# Altium PCB TP3PCB.PcbDoc
Units mm, origin at the board's own origin, x right, y up, seen from the top; angles counter-clockwise.
Board outline 41 x 58.5 mm, 2 copper layers (Top Layer, Bottom Layer); 36 components, 22 nets, 142 pads, 11 vias.
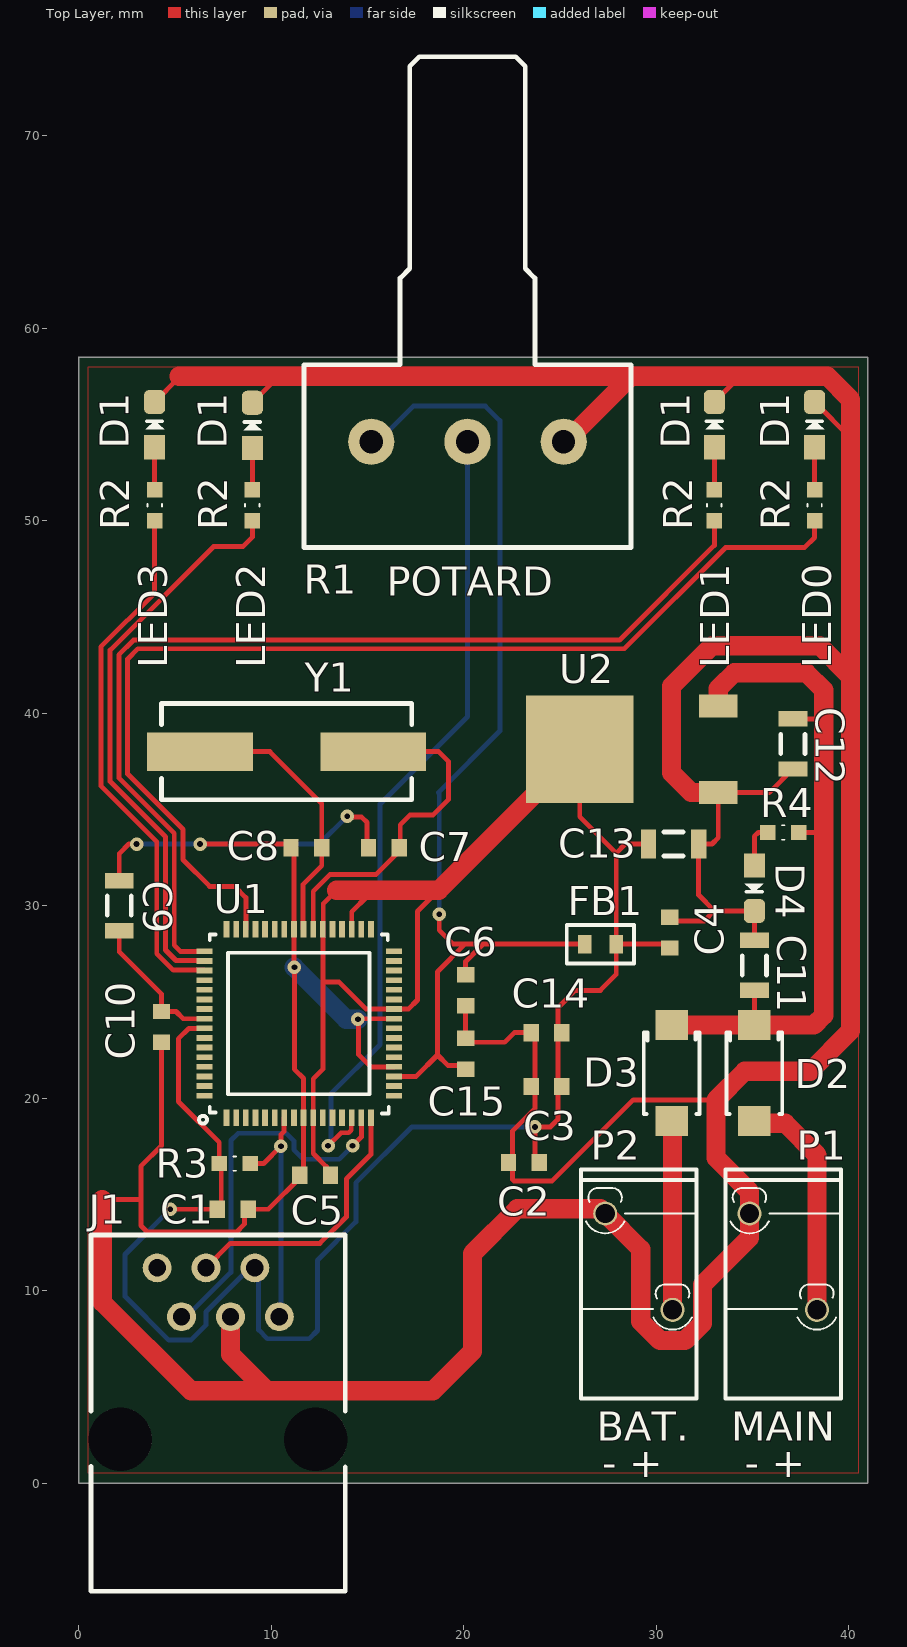
[diagram p0: Top Layer view]
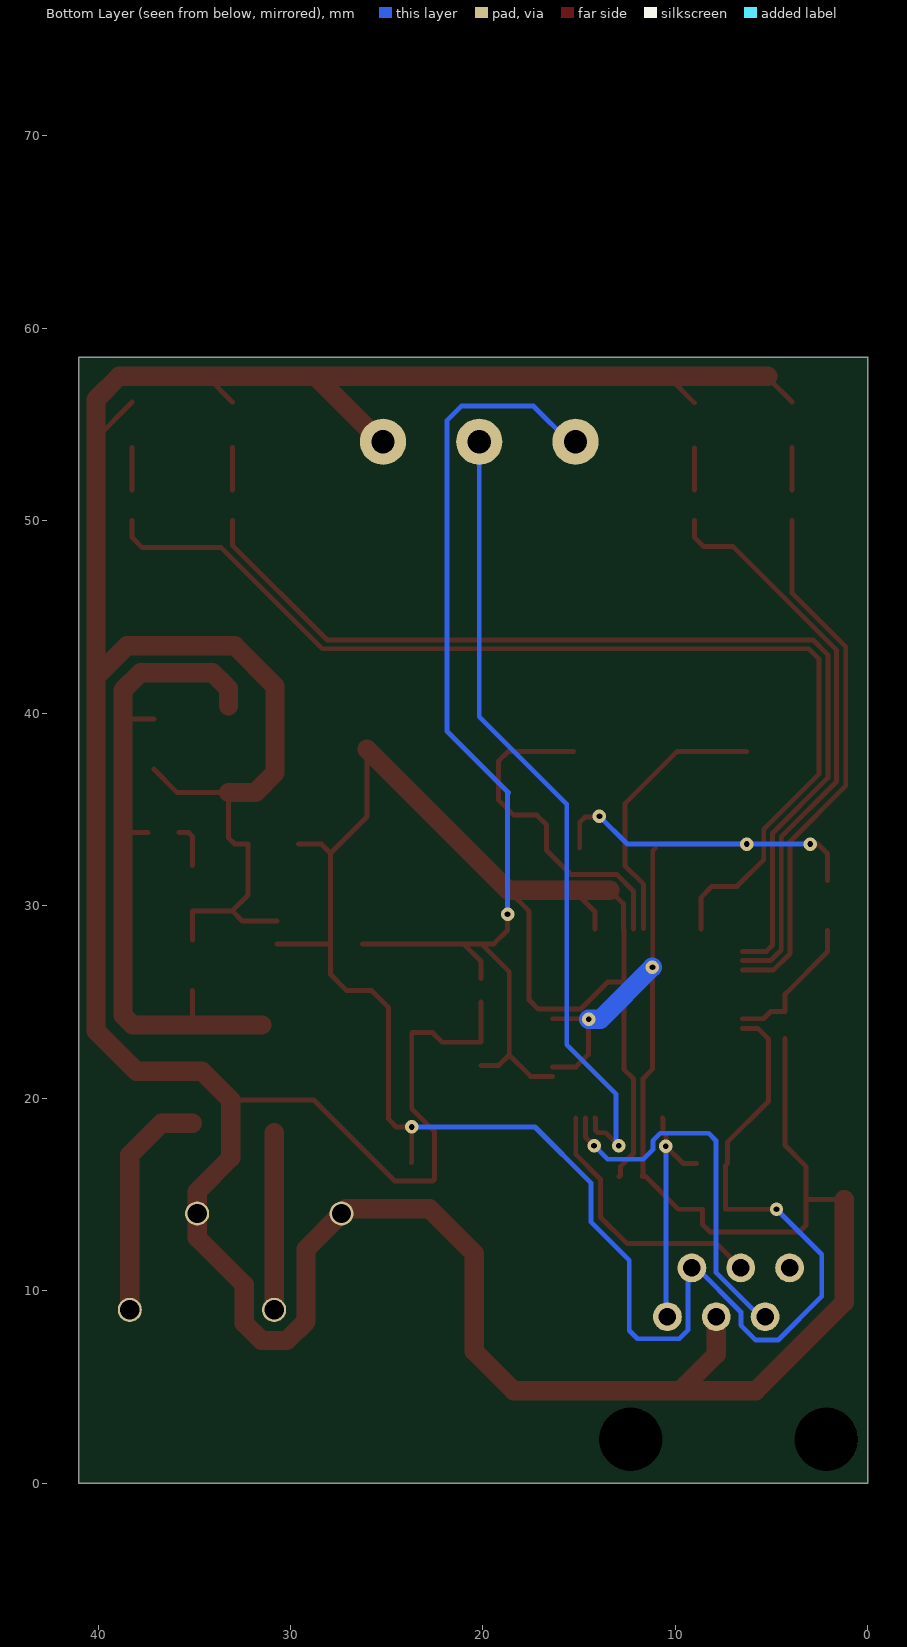
[diagram p1: Bottom Layer view, seen from below]

## Layer stack, top to bottom
Top Solder: solder mask 0.0102, Solder Resist, Dk 3.5
Top Layer: signal copper 0.0356
Dielectric 1: dielectric 0.32, FR-4, Dk 4.8
Bottom Layer: signal copper 0.0356
Bottom Solder: solder mask 0.0102, Solder Resist, Dk 3.5

## Board outline
0,0 0,58.5 41,58.5 41,0

## Design rules (kind name [scope] priority, off if disabled: settings)
Clearance [All] p1: gap=0.2 except(0.254: Arc-Arc)
HoleSize [All] p1: absolutevalues=TRUE maxlimit=3.3 minlimit=0.025 maxpercent=80.000 minpercent=20.000
PolygonConnect [All] p1: connectstyle=Relief reliefconductorwidth=0.254 reliefentries=4 polygonreliefangle="90 Angle" airgapwidth=0.254
RoutingVias [All] p1 off: holewidth=0.711 width=1.27 viastyle="Through Hole" minholewidth=0.711 minwidth=1.27 maxholewidth=0.711 maxwidth=1.27
SilkToBoardRegionClearance [All] p1 off:
SolderMaskExpansion [All] p1: expansion=0.102
UnpouredPolygon [All] p1: allowunpoured=FALSE
Width [All] p1: maxlimit=1 minlimit=0.254 preferedwidth=0.254 minimp=50.000000 maximp=50.000000 favimp=50.000000
Width GND [InNet('GND')] p2: maxlimit=1 minlimit=0.508 preferedwidth=1 minimp=50.000000 maximp=50.000000 favimp=50.000000
Width ALIM [InNet('ALIM')] p3: maxlimit=1 minlimit=0.254 preferedwidth=1
Width BATTERY [InNet('BATTERY')] p4: maxlimit=1 minlimit=0.254 preferedwidth=1
27 further rules are at their usual default settings.

## Classes and differential pairs
channel class led: LED0 LED1 LED2 LED3
net class LED[0..3]: LED0 LED1 LED2 LED3
component class TP3: R1
component class POWER: C11 C12 C13 C14 C15 D2 D3 D4 FB1 P1 P2 R4 U2
component class PIC: C1 C2 C3 C4 C5 C6 C7 C8 C9 C10 J1 R3 U1 Y1
component class LED3: R2
component class LED0: LED3_LED0 R2_3_LED1

## Components (designator, comment, footprint, x,y, rotation, side; value= is the part's Value field where it differs from the comment)
C1 "100nF" CAPC1608N#1 8.001,14.224 r180 top
C2 "100nF" CAPC1608N#1 23.125,16.65 r0 top
C3 "100nF" CAPC1608N#1 24.3,20.6 r0 top
C4 "100nF" CAPC1608N#1 30.7,28.6 r270 top
C5 "100nF" CAPC1608N#1 12.275,16 r0 top
C6 "100nF" CAPC1608N#1 20.1,25.6 r90 top
C7 "20pF" CAPC1608N#1 15.85,33 r180 top
C8 "20pF" CAPC1608N#2 11.825,33 r0 top
C9 "10uF" CAPC2012N 2.1,30 r270 top
C10 "1uF" CAPC1608N#1 4.3,23.7 r90 top
C11 "10uF" CAPC2012N 35.1,26.9 r270 top
C12 "10uF" CAPC2012N 37.1,38.4 r90 top
C13 "10uF" CAPC2012N 30.9,33.2 r180 top
C14 "1uF" CAPC1608N#1 24.3,23.4 r0 top
C15 "100nF" CAPC1608N#1 20.1,22.3 r270 top
D1 "Green LED" "LED 0805" 3.937,54.991 r90 top
D1 "Green LED" "LED 0805" 9.017,54.953 r90 top
D1 "Green LED" "LED 0805" 33.02,54.991 r90 top
D1 "Green LED" "LED 0805" 38.227,54.991 r90 top
D2 "GF1A" SMA/DO-214AC 35.1,21.3 r90 top
D3 "GF1A" SMA/DO-214AC 30.8,21.3 r90 top
D4 "Green LED" "LED 0805" 35.1,30.9 r270 top
FB1 "600r" INDC1608AN 27.1,28 r0 top
J1 "Program / Debug" RJ12_90 7.239,6.731 r270 top
P1 "12V Main" PHOENIX_1985195 36.6,11.5 r0 top
P2 "12V Battery" PHOENIX_1985195 29.1,11.5 r0 top
R1 "1kΩ" PDB181-K 20.193,54.102 r0 top
R2 "330Ω" RESC1608N 3.937,50.8 r270 top
R2 "330Ω" RESC1608N 9.017,50.8 r270 top
R2 "330Ω" RESC1608N 33.02,50.8 r270 top
R2 "330Ω" RESC1608N 38.227,50.8 r270 top
R3 "4.7kΩ" RESC1608N 8.1,16.6 r180 top
R4 "470Ω" RESC1608N 36.6,33.8 r0 top
U1 "PIC32MX764F128H-I/PT" QFP50P1200X1200X120-64 11.43,23.876 r90 top
U2 "AP1117" TD03B_N 29.625,38.125 r90 top
Y1 "8MHz" HC49SDLF 10.8,38 r0 top

## Footprints (in the part's own frame and the unit in brackets; to place one, negate y for a bottom-side part, rotate by r counter-clockwise, add the part's x,y. Pads: shape width x height; smd on the part's side, far side on the other; paste and mask are expansions set on the pad)
CAPC1608N#1 [mm]
  rect 0.8x0.9 smd: 1(-0.8,0) 2(0.8,0)
CAPC1608N#2 [mm]
  rect 0.8x0.9 smd: 1(0.8,0) 2(-0.8,0)
CAPC2012N [mm]
  rect 0.8x1.5 smd: 1(-1.3,0) 2(1.3,0)
  silkscreen extent -0.5,-0.63 0.5,0.63
HC49SDLF [mm]
  rect 5.5x2 smd: 1(-4.5,0) 2(4.5,0)
  silkscreen extent -6.5,-2.5 6.5,2.5
INDC1608AN [mm]
  rect 0.7x0.95 smd: 1(0.825,0) 2(-0.825,0)
  silkscreen extent -1.75,-1 1.75,1
"LED 0805" [mm]
  rect 1.25x1.1 smd: 1(-1.175,0)
  rrect50% 1.25x1.1 smd: 2(1.175,0)
  silkscreen extent -0.25,-0.5 0.2,0.45
PDB181-K [mm]
  round 2.4 hole 1.2: 1(-5,0) 2(0,0) 3(5,0)
  silkscreen extent -8.5,-5.5 8.5,20
PHOENIX_1985195 [mm]
  round 1.25 hole 1: 1(-1.75,2.5) 2(1.75,-2.5)
  silkscreen extent -3,-7.1 3,4.8
QFP50P1200X1200X120-64 [mm]
  rect 0.85x0.3 smd: 1(-4.9,3.75) 2(-4.9,3.25) 3(-4.9,2.75) 4(-4.9,2.25) 5(-4.9,1.75) 6(-4.9,1.25) 7(-4.9,0.75) 8(-4.9,0.25) 9(-4.9,-0.25) 10(-4.9,-0.75) 11(-4.9,-1.25) 12(-4.9,-1.75) 13(-4.9,-2.25) 14(-4.9,-2.75) 15(-4.9,-3.25) 16(-4.9,-3.75) 33(4.9,-3.75) 34(4.9,-3.25) 35(4.9,-2.75) 36(4.9,-2.25) 37(4.9,-1.75) 38(4.9,-1.25) 39(4.9,-0.75) 40(4.9,-0.25) 41(4.9,0.25) 42(4.9,0.75) 43(4.9,1.25) 44(4.9,1.75) 45(4.9,2.25) 46(4.9,2.75) 47(4.9,3.25) 48(4.9,3.75)
  rect 0.3x0.85 smd: 17(-3.75,-4.95) 18(-3.25,-4.95) 19(-2.75,-4.95) 20(-2.25,-4.95) 21(-1.75,-4.95) 22(-1.25,-4.95) 23(-0.75,-4.95) 24(-0.25,-4.95) 25(0.25,-4.95) 26(0.75,-4.95) 27(1.25,-4.95) 28(1.75,-4.95) 29(2.25,-4.95) 30(2.75,-4.95) 31(3.25,-4.95) 32(3.75,-4.95) 49(3.75,4.9) 50(3.25,4.9) 51(2.75,4.9) 52(2.25,4.9) 53(1.75,4.9) 54(1.25,4.9) 55(0.75,4.9) 56(0.25,4.9) 57(-0.25,4.9) 58(-0.75,4.9) 59(-1.25,4.9) 60(-1.75,4.9) 61(-2.25,4.9) 62(-2.75,4.9) 63(-3.25,4.9) 64(-3.75,4.9)
  silkscreen extent -5.21,-4.67 4.62,5.18
RESC1608N [mm]
  rect 0.8x0.8 smd: 1(-0.8,0) 2(0.8,0)
  silkscreen extent -0.08,-0.38 0.08,0.38
RJ12_90 [mm]
  round 3.25 hole 3.3 unplated: 0(4.45,5.08) 0(4.45,-5.08)
  round 1.5 hole 0.9: 1(-1.91,3.18) 2(-4.45,1.91) 3(-1.91,0.64) 4(-4.45,-0.63) 5(-1.91,-1.9) 6(-4.45,-3.17)
  silkscreen extent -6.15,-6.6 12.35,6.6
SMA/DO-214AC [mm]
  rect 1.56x1.68 smd: 1(-2.5,0) 2(2.5,0)
  silkscreen extent -2.12,-1.45 2.1,1.45
TD03B_N [mm]
  rect 1.2x2 smd: 1(-2.25,-3.6) 3(2.25,-3.6)
  rect 5.6x5.6 smd: 4(0,3.6)

## Part data
C1 C2 C3 C4 C5 C6 C7 C8 C9 C10 C11 C12 C13 C14 C15: library part Cap, "Capacitor"
D1 D1 D1 D1 D4: library part LED0, "Typical INFRARED GaAs LED"
D2 D3: library part Diode, "Default Diode"
FB1: library part Inductor, "Inductor"
J1: library part CON6
P1 P2: library part "Header 2", "Header, 2-Pin"
R1: library part RPot, "Potentiometer"
R2 R2 R2 R2 R3 R4: library part Res1, "Resistor"
U1: "PIC32MX764F128H"
U2: "1A LDO, 18V input, DPAK"
Y1: library part XTAL, "Crystal Oscillator"

## Via types
v1: diameter 0.7, hole 0.3, Top Layer to Bottom Layer, 11 vias

## Nets (pads, with @x,y where several pads share a name; then routed paths per layer and width w, separated by ;. In a path a pad name is that pad's centre, name@x,y a point inside that pad or via, vN(x,y) a via of type N, cw(c..) or ccw(c..) an arc to the next point about the centre after c; other vN are vias at no path point)
ALIM: D2.1 P1.2 | length 12
  Top Layer w1: D2.1@35.1,18.7 36.7,18.7 38.35,17.05 P1.2
BATTERY: D3.1 P2.2 | length 9.2
  Top Layer w1: P2.2 D3.1@30.85,18.2
GND: C1.1 C2.1 C3.1 C4.1 C5.1 C6.1 C7.2 C8.2 C9.1 C10.1 C11.1 C12.1 C13.1 C14.1 C15.1 D1.2 D4.2 J1.3 P1.1 P2.1 R1.3 U1.9 U1.20 U1.25 U1.41 U2.1 | length 291.5
  Top Layer w0.254: 1.225,14.725 3.225,14.725 ; C9.1 2.1,32.7 2.6,33.2 ; D1.2@3.937,56.166 5.2,57.429 ; C10.1@4.3,23.1 4.3,17.536 3.225,16.461 3.225,14.725 ; v1(6.3,33.2) C8.2@10.825,33.2 ; D1.2@9.017,56.128 10.389,57.5 ; C8.2 11.18,32.845 U1.41 11.18,26.82 v1(11.2,26.8) 11.2,21.5 11.68,21.02 U1.9 11.68,16.045 11.725,16 11.725,15.925 11.55,15.925 9.849,14.224 8.601,14.224 8.601,13.444 8.2,13.043 3.564,13.043 3.225,13.382 3.225,14.725 ; v1(13.95,34.65) 14,34.6 14.7,34.6 14.975,34.325 C7.2@14.975,33 ; U1.20 15.174,21.626 14.526,22.274 14.526,24.126 U1.25 ; C6.1@20.1,25 20.1,22.9 22.125,22.9 22.625,23.4 23.7,23.4 23.7,19.457 22.525,18.282 22.525,15.775 22.6,15.7 24.6,15.7 28.807,19.907 33.093,19.907 33.1,19.9 ; C4.1@30.7,29.2 32.5,29.2 33.025,29.725 ; D1.2@33.02,56.166 34.3,57.446 ; C11.1 D4.2 33.025,29.725 ; C12.1 35.875,35.875 U2.1 33.225,33.525 32.9,33.2 C13.1 32.2,30.55 33.025,29.725 ; D1.2@38.227,56.166 40.1,54.293
  Top Layer w1: 1.225,14.725 1.225,9.4 5.825,4.8 18.4,4.8 20.45,6.85 20.45,11.925 22.775,14.25 27.1,14.25 P2.1 29.2,12.15 29.2,8.4 30.2,7.4 31.5,7.4 32.4,8.3 32.4,10.3 34.85,12.75 P1.1 34.85,15.15 33.1,16.9 33.1,19.9 34.6,21.4 38,21.4 40.1,23.5 40.1,41.897 ; 5.2,57.5 10.389,57.5 28.7,57.5 ; J1.3 7.879,6.696 9.725,4.85 ; R1.3 25.302,54.102 28.7,57.5 ; U2.1 31.825,35.875 30.8,36.9 30.8,41.4 32.9,43.5 38.497,43.5 40.1,41.897 ; 28.7,57.5 38.9,57.5 40.1,56.3 40.1,54.293 40.1,41.897
  Bottom Layer w0.254: v1(3,33.2) v1(6.3,33.2) 12.5,33.2 v1(13.95,34.65)
  Bottom Layer w1: v1(11.2,26.8) 13.9,24.1 v1(14.5,24.1)
LED0: R2.2@38.227,50 U1.46 | length 56.5
  Top Layer w0.254: U1.46 8.68,30.42 8.1,31 6.8,31 5.412,32.388 5.412,33.963 2.533,36.842 2.533,42.808 3.071,43.346 28.346,43.346 33.6,48.6 37.7,48.6 38.227,49.127 R2.2@38.227,50
LED1: R2.2@33.02,50 U1.49 | length 52.6
  Top Layer w0.254: U1.49 5.274,27.626 4.958,27.942 4.958,33.759 2.079,36.638 2.079,43.029 2.85,43.8 28.1,43.8 33.02,48.72 R2.2@33.02,50
LED2: R2.2@9.017,50 U1.50 | length 29.7
  Top Layer w0.254: U1.50@6.507,27.149 5.051,27.149 4.504,27.696 4.504,33.571 1.625,36.45 1.625,43.275 7,48.65 8.525,48.65 9.017,49.142 R2.2@9.017,50
LED3: R2.2@3.937,50 U1.51 | length 27.7
  Top Layer w0.254: R2.2@3.937,50 3.937,46.229 1.15,43.442 1.15,36.225 4.05,33.325 4.05,27.508 4.909,26.649 U1.51@6.507,26.649
MCLR: J1.1 R3.1 U1.7 | length 12.3
  Top Layer w0.254: R3.1 9.6,16.6 v1(10.5,17.5) 10.5,18.1 10.657,18.257 10.657,18.953 U1.7
  Bottom Layer w0.254: J1.1@10.5,8.722 v1(10.5,17.5)
NetC9_2: C9.2 C10.2 U1.56 | length 7.5
  Top Layer w0.254: C9.2 2.1,27.6 4.3,25.4 C10.2 5.05,24.5 5.424,24.126 U1.56
NetD1_LED0_1: D1.1@38.227,53.816 R2.1@38.227,51.6 | length 2.2
  Top Layer w0.254: R2.1@38.227,51.6 D1.1@38.227,53.816
NetD1_LED1_1: D1.1@33.02,53.816 R2.1@33.02,51.6 | length 2.2
  Top Layer w0.254: R2.1@33.02,51.6 D1.1@33.02,53.816
NetD1_LED2_1: D1.1@9.017,53.778 R2.1@9.017,51.6 | length 2.2
  Top Layer w0.254: R2.1@9.017,51.6 D1.1@9.017,53.778
NetD1_LED3_1: D1.1@3.937,53.816 R2.1@3.937,51.6 | length 2.2
  Top Layer w0.254: R2.1@3.937,51.6 D1.1@3.937,53.816
NetD4_1: D4.1 R4.1 | length 2.3
  Top Layer w0.254: D4.1 35.1,33.6 35.3,33.8 R4.1
NetR1_2: R1.2 U1.14 | length 41.7
  Top Layer w0.254: v1(12.95,17.525) 13.628,18.203 14.028,18.203 14.157,18.332 14.157,18.953 U1.14
  Bottom Layer w0.254: v1@13.095,17.525 13.095,20.22 15.65,22.775 15.65,35.275 20.193,39.818 R1.2
PGC: J1.5 U1.15 | length 19.4
  Top Layer w0.254: v1(14.226,17.526) 14.68,17.98 U1.15
  Bottom Layer w0.254: J1.5@5.592,8.641 7.9,10.949 7.9,17.8 8.277,18.177 10.78,18.177 11.177,17.78 11.177,17.323 11.677,16.823 13.523,16.823 v1(14.226,17.526)
PGD: J1.4 U1.16 | length 14.1
  Top Layer w0.254: J1.4 7.878,12.45 12.525,12.45 13.9,13.825 13.9,15.8 15.18,17.08 U1.16
V3P3: C1.2 C2.2 C3.2 C4.2 C5.2 C13.2 C14.2 FB1.1 J1.2 R3.2 U1.10 U1.26 U1.35 U1.38 U1.57 U2.4 | length 130
  Top Layer w0.254: v1(4.75,14.225) 7.4,14.225 7.401,14.224 R3.2@7.401,16.499 ; U1.57 5.726,23.626 5.175,23.075 5.175,19.825 7.3,17.7 R3.2 ; C5.2@12.925,15.925 12.862,15.987 12.862,16.438 12.18,17.12 U1.10 12.18,21.005 12.68,21.505 12.68,26.025 ; 13.4,30.8 12.703,30.103 12.703,28.799 U1.38 12.68,26.025 ; U1.35 14.18,29.68 15,30.5 ; 18.7,30.8 17.6,29.7 17.6,25.1 17.126,24.626 U1.26 14.931,24.626 13.532,26.025 12.68,26.025 ; C2.2@23.725,16.65 23.7,16.675 v1(23.7,18.5) 24.5,18.5 24.9,18.9 24.9,24.7 25.8,25.6 27.1,25.6 27.925,26.425 FB1.1 ; U2.4 26.025,34.625 27.925,32.725 ; C13.2 28.4,33.2 27.925,32.725 ; C4.2@30.7,28 FB1.1 ; FB1.1 27.925,32.725
  Top Layer w1: 13.4,30.8 18.7,30.8 U2.4
  Bottom Layer w0.254: v1(4.75,14.225) 2.4,11.875 2.4,9.7 4.675,7.425 5.825,7.425 6.6,8.2 6.6,8.885 8.896,11.181 J1.2 9.342,11.181 9.342,7.958 9.8,7.5 11.972,7.5 12.4,7.928 12.4,11.575 14.398,13.573 14.398,15.598 17.3,18.5 v1(23.7,18.5)
V3P3A: C6.2 C15.2 FB1.2 R1.1 U1.19 | length 56.4
  Top Layer w0.254: U1.19 17.526,21.126 18.637,22.238 ; v1(18.725,29.55) 18.725,28.725 19.437,28.012 20.087,28.012 ; C15.2@20.1,21.7 19.175,21.7 18.637,22.238 ; C6.2@20.1,26.2 20.1,27.1 21,28 FB1.2 ; 20.987,28.012 20.087,28.012 ; 18.637,22.238 18.637,26.562 20.087,28.012
  Bottom Layer w0.254: R1.1 15.527,54.102 17.375,55.95 21.125,55.95 21.875,55.2 21.875,39.075 18.675,35.875 18.725,35.825 v1(18.725,29.55)
V5: C11.2 C12.2 D2.2 D3.2 R4.2 U2.3 | length 36
  Top Layer w0.254: D2.2 C11.2 ; C12.2 38.7,39.7 ; R4.2 38.6,33.8
  Top Layer w1: D3.2@31.5,23.8 D2.2 38.2,23.8 38.7,24.3 38.7,39.7 38.7,41.2 37.8,42.1 34.05,42.1 33.33,41.38 33.33,41.373 33.225,41.268 U2.3
X1: C7.1 U1.39 Y1.2 | length 17.8
  Top Layer w0.254: U1.39 12.18,30.75 13.057,31.627 15.452,31.627 16.7,32.875 16.7,34.2 17.2,34.7 18.4,34.7 19.2,35.5 19.2,37.5 18.7,38 Y1.2
X2: C8.1 U1.40 Y1.1 | length 14.3
  Top Layer w0.254: Y1.1 9.925,38 12.625,35.3 C8.1 12.625,32.075 11.657,31.107 U1.40@11.657,28.799
pads on no net: J1.0 J1.6 U1.1 U1.2 U1.3 U1.4 U1.5 U1.6 U1.8 U1.11 U1.12 U1.13 U1.17 U1.18 U1.21 U1.22 U1.23 U1.24 U1.27 U1.28 U1.29 U1.30 U1.31 U1.32 U1.33 U1.34 U1.36 U1.37 U1.42 U1.43 U1.44 U1.45 U1.47 U1.48 U1.52 U1.53 U1.54 U1.55 U1.58 U1.59 U1.60 U1.61 U1.62 U1.63 U1.64

## Polygon pours and split planes (outlines as drawn)
GND on Top Layer "Top Layer-No Net" (solid, shelved, pour order 4): 0.5,58 40.5,58 40.5,0.5 0.5,0.5

## Keep-outs
Drill Drawing:
  lines w0.1: 0,58.5 0,58.5
Mechanical 32:
  the board outline again, w0.15

## Silkscreen, mask and mechanical layers (free items; w line width, h text height)
Top Overlay:
  text "POTARD" at 16,46.1 h1.52
  text "LED3" at 4.6,42.325 h1.52 r90
  text "LED2" at 9.7,42.325 h1.52 r90
  text "LED1" at 33.8,42.325 h1.52 r90
  text "LED0" at 39.1,42.325 h1.52 r90
  text "BAT." at 26.9,2.2 h1.52
  text "MAIN" at 33.9,2.2 h1.52
  text "- +" at 27.2,0.3 h1.52
  text "- +" at 34.6,0.3 h1.52
Drill Drawing:
  circle w0.085: c49.165,13.108 r0.635
  lines w0.085: 48.53,4.853 49.165,5.171 49.8,4.853 49.483,5.488 49.8,6.123 49.165,5.806 48.53,6.123 48.848,5.488 48.53,4.853 ; 48.53,8.663 49.8,8.663 49.8,9.933 48.53,9.933 48.53,8.663 ; 48.53,17.553 49.8,17.553 49.165,16.283 48.53,17.553 ; 48.53,20.411 48.848,20.411 48.848,20.093 49.483,20.093 49.483,20.411 49.8,20.411 49.8,21.046 49.483,21.046 49.483,21.363 48.848,21.363 48.848,21.046 48.53,21.046 48.53,20.411
  lines w0.381: 46.8,3.71 145.326,3.71 ; 46.8,22.76 145.326,22.76 ; 60.792,-0.1 60.792,26.57 ; 78.517,-0.1 78.517,26.57 ; 112.695,-0.1 112.695,26.57 ; 125.544,-0.1 125.544,26.57 ; 46.8,-0.1 145.326,-0.1 145.326,26.57 46.8,26.57 46.8,-0.1
  text "Symbol" at 49.086,23.903 h1.83
  text "Hit Count" at 61.935,23.903 h1.83
  text "Finished Hole Size" at 79.66,23.903 h1.83
  text "Plated" at 113.838,23.903 h1.83
  text "Hole Type" at 126.687,23.903 h1.83
  text "2" at 61.935,20.093 h1.52
  text "3.300mm (129.92mil)" at 79.66,20.093 h1.52
  text "NPTH" at 113.838,20.093 h1.52
  text "Round" at 126.687,20.093 h1.52
  text "3" at 61.935,16.283 h1.52
  text "1.200mm (47.24mil)" at 79.66,16.283 h1.52
  text "PTH" at 113.838,16.283 h1.52
  text "Round" at 126.687,16.283 h1.52
  text "4" at 61.935,12.473 h1.52
  text "1.000mm (39.37mil)" at 79.66,12.473 h1.52
  text "PTH" at 113.838,12.473 h1.52
  text "Round" at 126.687,12.473 h1.52
  text "6" at 61.935,8.663 h1.52
  text "0.900mm (35.43mil)" at 79.66,8.663 h1.52
  text "PTH" at 113.838,8.663 h1.52
  text "Round" at 126.687,8.663 h1.52
  text "11" at 61.935,4.853 h1.52
  text "0.300mm (11.81mil)" at 79.66,4.853 h1.52
  text "PTH" at 113.838,4.853 h1.52
  text "Round" at 126.687,4.853 h1.52
  text "26 Total" at 61.935,1.043 h1.52

## Dimensions
0,0 to 41,0 on Mechanical 1
0,58.5 to 0,0 on Mechanical 1